# Altium PCB UP.PcbDoc
Units mil, origin at the board's own origin, x right, y up, seen from the top; angles counter-clockwise.
Board outline 7645 x 3630 mil, 2 copper layers (Top Layer, Bottom Layer); 31 components, 40 nets, 121 pads, 7 vias.
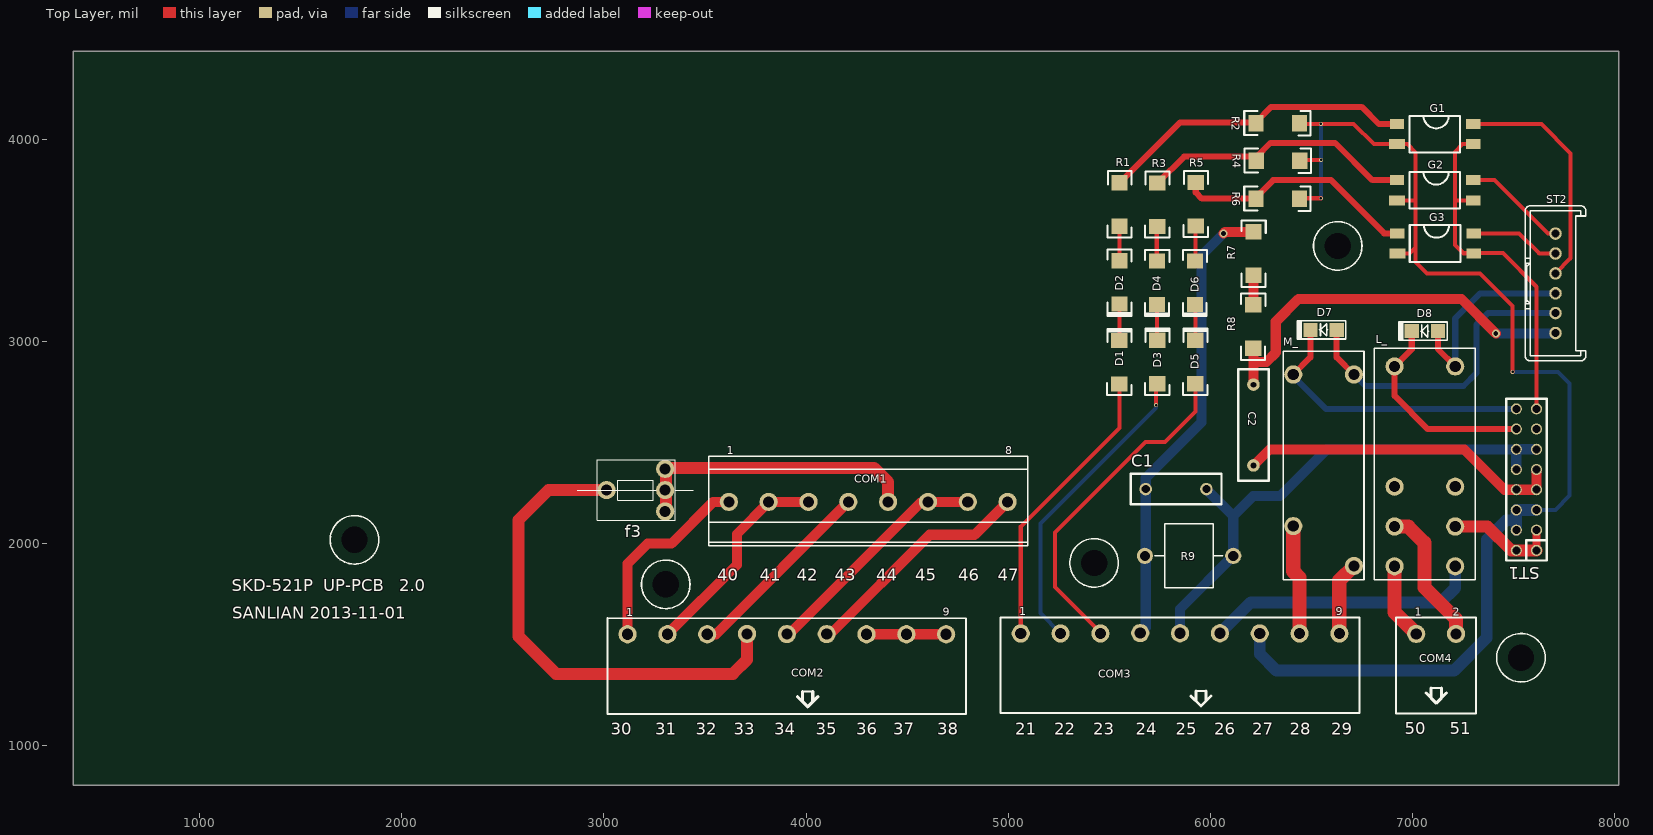
[diagram p0: Top Layer view]
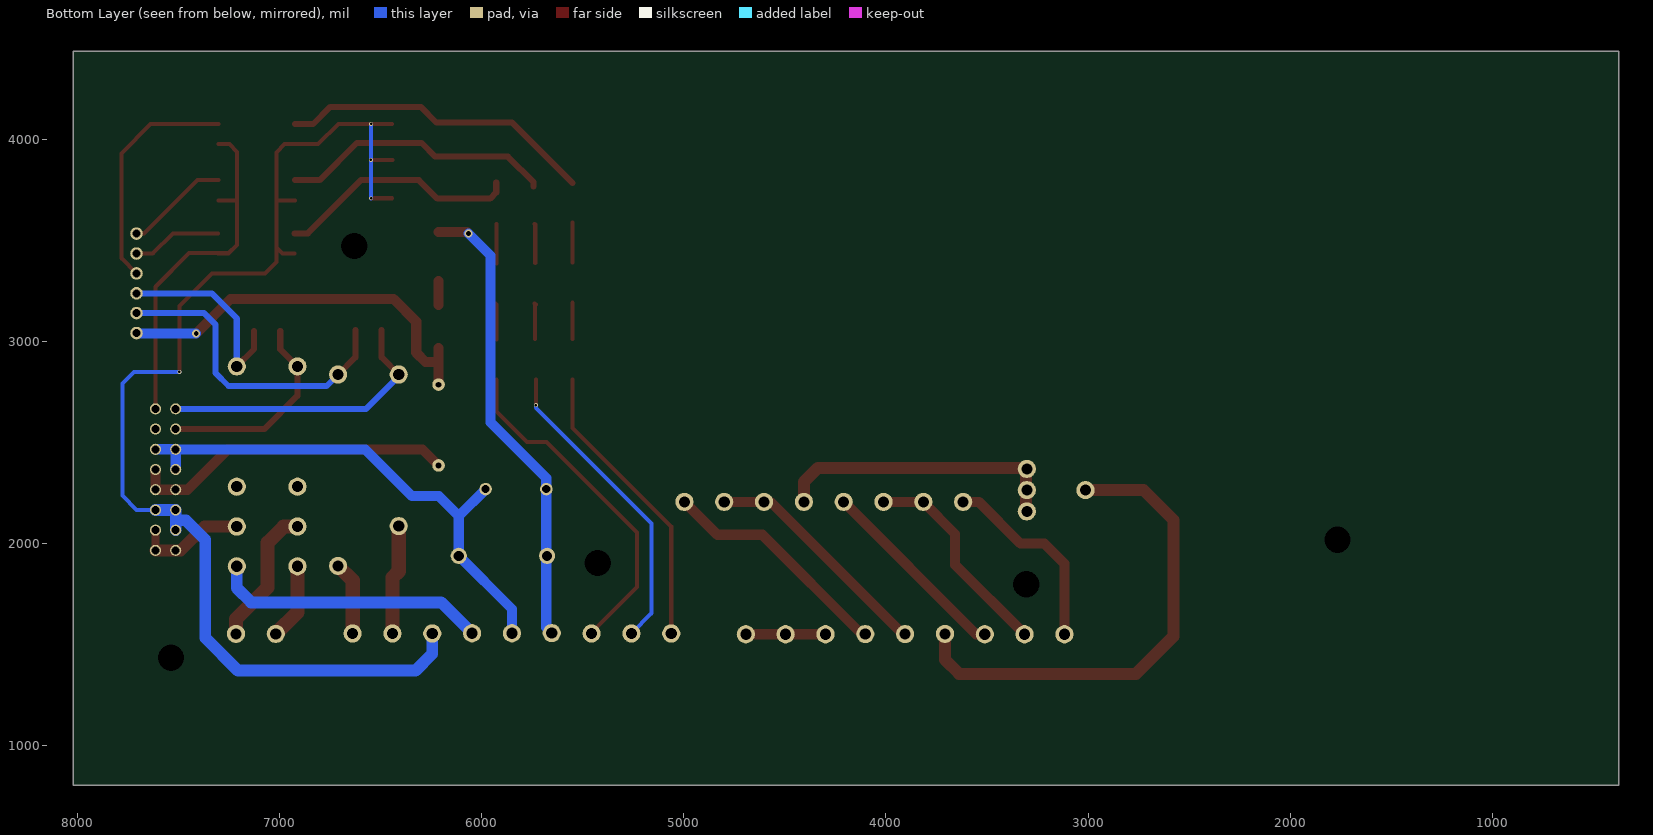
[diagram p1: Bottom Layer view, seen from below]

## Layer stack, top to bottom
Top Layer: signal copper 1.4
Dielectric: dielectric 12.6, FR-4, Dk 4.8
Bottom Layer: signal copper 1.4

## Board outline
8020,4435 8020,805 480,805 375,805 375,4435 8020,4435

## Design rules (kind name [scope] priority, off if disabled: settings)
Clearance [All] p1: gap=10
ComponentClearance [All] p1: gap=10 collisioncheckmode=3 verticalgap=10
PolygonConnect [All] p1: connectstyle=Relief reliefconductorwidth=10 reliefentries=4 polygonreliefangle="90 Angle"
RoutingVias [All] p1: holewidth=28 width=50 viastyle="Through Hole" minholewidth=28 minwidth=50 maxholewidth=28 maxwidth=50
SolderMaskExpansion [All] p1: expansion=4
TestPointUsage [All] p1: valid=0 allowmultiple=FALSE
Testpoint [All] p1: side=15 testpointundercomponent=TRUE minsize=40 maxsize=100 preferedsize=60 minholesize=0 maxholesize=40 preferedholesize=32 testpointgrid=1 style=1023 order=0-112345678
Width [All] p1: maxlimit=300 minlimit=10 preferedwidth=10
18 further rules are at their usual default settings.

## Components (designator, comment, footprint, x,y, rotation, side; value= is the part's Value field where it differs from the comment)
C1 "0.47nF/440V" RAD0.3 5680,2269 r0 top
C2 "33nF/400V" RAD0.4 6213,2786 r270 top
COM1 "CON8" "MKDS 3/8" 3618,2206 r0 top
COM2 "MSTB 2.5/9-G" "MSTB 2.5/9-G" 3117,1551 r0 top
COM3 "MSTB 2.5/9-G" "MSTB 2.5/9-G" 5062,1555 r0 top
COM4 "MSTB 2.5/2-G" "MSTB 2.5/2-G" 7018,1553 r0 top
D1 "GP10Y" ttd 5550,2907 r90 top
D2 "BZY97C100GP" ttd 5550,3281 r270 top
D3 "GP10Y" ttd 5738,2908 r90 top
D4 "BZY97C100GP" ttd 5736,3280 r270 top
D5 "GP10Y" ttd 5926,2908 r90 top
D6 "BZY97C100GP" ttd 5923,3280 r270 top
D7 "1N4148" 4148 6559,3059 r180 top
D8 "1N4148" 4148 7060,3053 r180 top
f3 "Component_1" f3 3168,2264 r0 top
G1 "SFH615A-3" gg 7117,4026 r270 top
G2 "SFH615A-3" gg 7117,3748 r270 top
G3 "SFH615A-3" gg 7119,3485 r270 top
L_ "RT424012" RT424012 6911,2876 r270 top
M_ "V23061-A1005-A302" V23061-A1005-A302 6410,2836 r270 top
R1 "33K/0.5W" TTR 5551,3677 r90 top
R2 "1K" TTR 6332,4079 r180 top
R3 "33K/0.5W" TTR 5738,3676 r90 top
R4 "1K" TTR 6334,3894 r180 top
R5 "33K/0.5W" TTR 5928,3678 r90 top
R6 "1K" TTR 6332,3706 r180 top
R7 "470K" TTR 6213.21,3433.81 r270 top
R8 "470K" TTR 6211,3073 r270 top
R9 "EF2500X" EF2500X 5676,1939 r0 top
ST1 "CON16" IDC16-A 7613,1966 r90 top
ST2 "CON6" STOCKO6V 7707,3041 r90 top

## Footprints (in the part's own frame and the unit in brackets; to place one, negate y for a bottom-side part, rotate by r counter-clockwise, add the part's x,y. Pads: shape width x height; smd on the part's side, far side on the other; paste and mask are expansions set on the pad)
4148 [mil]
  rect 70x70 smd: 1(-65.81,2.26) 2(64.19,2.26)
  silkscreen extent -111,-43 129,47
EF2500X [mil]
  round 80 hole 50: 1(0,0) 2(437,0)
  silkscreen extent 50,-158 386,158
f3 [mil]
  round 90 hole 55: 1(-155,0) 2(135,-105) 2(135,0) 2(135,105)
  silkscreen extent -300,-150 275,150
gg [mm]
  rect 1.25x1.8 smd: 1(-1.245,-4.928) 3(1.295,4.672) 4(-1.245,4.672)
  rect 1.25x2 smd: 2(1.295,-4.928)
  silkscreen extent -2.27,-3.38 2.33,2.97
IDC16-A [mil]
  round 55 hole 39.37: 1(0,0) 2(0,100) 3(100,0) 4(100,100) 5(200,0) 6(200,100) 7(300,0) 8(300,100) 9(400,0) 10(400,100) 11(500,0) 12(500,100) 13(600,0) 14(600,100) 15(700,0) 16(700,100)
  silkscreen extent -50,-50 750,150
"MKDS 3/8" [mil]
  round 90 hole 55: 1(0,0) 2(197,0) 3(394,0) 4(591,0) 5(788,0) 6(985,0) 7(1182,0) 8(1379,0)
  silkscreen extent -100,-217 1478,225
"MSTB 2.5/2-G" [mil]
  round 90 hole 55: 1(0,0) 2(197,0)
  silkscreen extent -100,-394 296,80
"MSTB 2.5/9-G" [mil]
  round 90 hole 55: 1(0,0) 2(197,0) 3(394,0) 4(591,2) 5(788,1) 6(985,1) 7(1182,0) 8(1379,0) 9(1576,0)
  silkscreen extent -100,-394 1675,80
RAD0.3 [mil]
  round 62 hole 40: 1(0,0) 2(300,0)
  silkscreen extent -75,-75 375,75
RAD0.4 [mil]
  round 62 hole 28: 1(0,0) 2(400,0)
  silkscreen extent -75,-75 475,75
RT424012 [mil]
  round 90 hole 55: 11(791.85,0) 12(595,0) 14(988.7,0) 21(791.85,300) 22(595,300) 24(988.7,300) A1(0,0) A2(0,300)
  silkscreen extent -90,-100 1055,400
STOCKO6V [mil]
  round 62 hole 39.37: 1(0,0) 2(98.33,0) 3(196.67,0) 4(295,0) 5(393.33,0) 6(491.67,0)
  silkscreen extent -138,-150 629,150
ttd [mil]
  rect 75x80 smd: 1(-117.93,0.6) 2(97.07,0.6)
  silkscreen extent -173,-59 155,61
TTR [mil]
  rect 75x80 smd: 1(-107.93,0.6) 2(107.07,0.6)
  silkscreen extent -163,-59 165,61
V23061-A1005-A302 [mil]
  round 90 hole 55: 11(750,0) 14(946.85,300) A1(0,0) A2(0,300)
  silkscreen extent -115,-50 1015,350

## Part data
C1: library part CAP, "Capacitor"
D1 D3 D5 D7 D8: library part DIODE, "Diode"
D2 D4 D6: library part ZENER3, "Zener Diode"
R1 R2 R3 R4 R5 R6 R7 R8: library part RES2

## Free pads (board coordinates)
  round 90.55 hole 129.92: ""(1766,2018) ""(3306,1798) ""(5425,1904) ""(6630,3472) ""(7536,1435)

## Via types
v1: diameter 19.68, hole 11.81, Top Layer to Bottom Layer, 5 vias
v2: diameter 39.37, hole 23.62, Top Layer to Bottom Layer, 2 vias

## Nets (pads, with @x,y where several pads share a name; then routed paths per layer and width w, separated by ;. In a path a pad name is that pad's centre, name@x,y a point inside that pad or via, vN(x,y) a via of type N, cw(c..) or ccw(c..) an arc to the next point about the centre after c; other vN are vias at no path point)
12V: D7.2 M_.A1 ST1.16 | length 1434.6
  Top Layer w30: M_.A1 6494.81,2920.81 D7.2
  Bottom Layer w30: M_.A1 6410,2827 6571,2666 ST1.16
AC220_L: L_.21 ST1.1 ST1.2 ST1.3 | length 550.9
  Top Layer w39.37: ST1.1 ST1.3
  Top Layer w59.06: L_.21 7369.85,2084.15 7488,1966 ST1.1
AC220_N: COM3.7 G1.2 G2.2 G3.2 R2.1 R4.1 R6.1 ST1.4 ST1.5 ST1.6 | length 6092.6
  Top Layer w20: R4.1@6441.81,3897.79 v1(6547.79,3897.79) ; R6.1@6443.81,3707.79 v1(6546.79,3707.79) ; R2.1@6443.81,4075.79 6708.21,4075.79 6809,3975 6975,3975 7015,3935 7015,3393 7072,3336 7334,3336 7495,3175 v1(7495,2849) ; G2.2 7012,3697 7014,3695 ; G3.2 6985,3434 7015,3464
  Bottom Layer w20: v1(6546.79,3707.79) v1(6546.79,4075.79) ; v1(7495,2849) 7719,2849 7777,2791 7777,2237 7706,2166 ST1.5
  Bottom Layer w59.06: COM3.7 6244,1454 6327,1371 7205,1371 7367,1533 7367,2019 7463,2115 7506,2115 7513,2122 ; ST1.4 ST1.6 ST1.5
AC230V_L: C2.2 ST1.7 ST1.8 ST1.9 | length 1615.2
  Top Layer w50: C2.2 6292,2465 7256,2465 7455,2266 ST1.7 ST1.9
AC230V_N: C1.2 COM3.5 R9.2 ST1.10 ST1.11 ST1.12 | length 2621.3
  Bottom Layer w50: COM3.5 5850,1676 R9.2@6118.5,1944.5 ; C1.2 6113,2136 ; R9.2 6113,2136 ; ST1.10 7513,2465 6575,2465 6344,2234 6211,2234 6113,2136 ; ST1.12@7513,2463 7516,2466 ST1.11
COM-21#: COM3.1 D1.1 | length 1459.4
  Top Layer w20: COM3.1 5062,2083 5550.4,2571.4 D1.1@5550.4,2812.07
COM-22#: COM3.2 D3.1 | length 1534.6
  Top Layer w20: v1(5731.4,2684.4) D3.1@5731.4,2811.07
  Bottom Layer w20: COM3.2 5159,1655 5159,2099 5731.4,2671.4 v1(5731.4,2684.4)
COM-23#: COM3.3 D5.1 | length 1691.1
  Top Layer w20: COM3.3 5456,1560 5232,1784 5232,2054 5680,2502 5775,2502 5926.4,2653.4 D5.1@5926.4,2810.07
COM-24#: C1.1 COM3.4 R7.1 R9.1 | length 2299.7
  Top Layer w50: v2(6064.79,3533.79) 6072.75,3541.75 R7.1
  Bottom Layer w50: COM3.4 5680,1584 5680,2324 5956,2600 5956,3425 v2(6064.79,3533.79)
COM-26#: COM3.6 L_.24 | length 1364.1
  Bottom Layer w59.06: COM3.6 6200,1709 7140,1709 7211,1780 L_.24
COM-28#: COM3.8 M_.11 | length 543.8
  Top Layer w70.87: M_.11 6410,1863 6441,1832 COM3.8
COM-29#: COM3.9 M_.14 | length 364
  Top Layer w70.87: COM3.9 6638,1817.15 M_.14
COM-50#: COM4.1 L_.14 | length 378.6
  Top Layer w70.87: L_.14 6911,1660 COM4.1
COM-51#: COM4.2 L_.11 | length 696.2
  Top Layer w70.87: L_.11 6977.85,2084.15 7059,2003 7059,1782 7215,1626 COM4.2
FUS1: COM1.5 f3.2 | length 1445.4
  Top Layer w59.06: f3.2@3303,2361 3316,2374 4336,2374 4406,2304 COM1.5 ; f3.2@3307,2156 f3.2@3307,2366
FUS2: COM2.4 f3.1 | length 2436.5
  Top Layer w59.06: f3.1 2725,2264 2578,2117 2578,1540 2763,1355 3638,1355 3708,1425 COM2.4
J1-13#: D8.2 L_.A1 ST1.14 | length 1025.8
  Top Layer w30: D8.2 6995.81,2960.81 L_.A1 6911,2730 7075,2566 ST1.14
J1-14#: G1.3 G2.3 G3.3 ST1.15 | length 1859.7
  Top Layer w20: 7210,3476 7252,3434 G3.3 ; 7211,3697 G2.3 ; G1.3 7248,3975 7210,3937 7210,3477 7251,3436 7447,3436 7613,3270 ST1.15
J2-1#: G2.4 ST2.6 | length 515.5
  Top Layer w20: G2.4 7406,3797 7670.33,3532.67 ST2.6
J2-2#: G3.4 ST2.5 | length 445.3
  Top Layer w20: G3.4 7527,3534 7626.67,3434.33 ST2.5
J2-3#: G1.4 ST2.4 | length 1166.2
  Top Layer w20: G1.4 7637,4075 7782,3930 7782,3411 ST2.4
J2-4#: D8.1 L_.A2 ST2.3 | length 995.3
  Top Layer w30: D8.1 7125.81,2961.19 L_.A2
  Bottom Layer w30: L_.A2 7211,3114 7334.67,3237.67 ST2.3
J2-5#: D7.1 M_.A2 ST2.2 | length 1566.5
  Top Layer w30: D7.1 6624.81,2921.19 M_.A2
  Bottom Layer w30: M_.A2 6767,2779 7252,2779 7316,2843 7316,3083 7372.33,3139.33 ST2.2
J2-6#: C2.1 R8.2 ST2.1 | length 1963.6
  Top Layer w50: C2.1 R8.2@6213,2965.93 ; 6213,2898 6277,2898 6323,2944 6323,3097 6435,3209 7242,3209 v2(7412,3039)
  Bottom Layer w50: v2(7412,3039) 7705,3039 ST2.1
NetCOM1_1: COM1.1 COM2.1 | length 976.7
  Top Layer w50: COM2.1 3117,1900 3217,2000 3335,2000 3541,2206 COM1.1
NetCOM1_2: COM1.2 COM1.3 COM2.2 | length 1058.3
  Top Layer w50: COM2.2 3658,1895 3658,2047 3817,2206 COM1.3
NetCOM1_4: COM1.4 COM2.3 | length 969.3
  Top Layer w50: COM2.3 3554,1551 COM1.4
NetCOM1_6: COM1.6 COM1.7 COM2.5 | length 1165.9
  Top Layer w50: COM2.5 3917,1552 4571,2206 COM1.6 COM1.7
NetCOM1_8: COM1.8 COM2.6 | length 1165.9
  Top Layer w50: COM2.6 4121,1552 4612,2043 4834,2043 COM1.8
NetCOM2_7: COM2.7 COM2.8 COM2.9 | length 394
  Top Layer w50: COM2.7 COM2.8 COM2.9
NetD1_2: D1.2 D2.2 | length 179
  Top Layer w20: D1.2@5550.4,3012.07 5550.4,3190.74 D2.2@5550.6,3190.93
NetD2_1: D2.1 R1.1 | length 196.1
  Top Layer w20: D2.1@5550.6,3390.93 R1.1@5550.6,3587
NetD3_2: D3.2 D4.2 | length 179.4
  Top Layer w20: D4.2@5731.4,3181.74 D4.2@5737.6,3187.93 ; D3.2@5735.4,3011.07 D4.2@5735.4,3181.74
NetD4_1: D4.1 R3.1 | length 194.8
  Top Layer w20: R3.1@5733.6,3576.81 R3.1@5737.79,3581 ; D4.1@5734.6,3387.93 R3.1@5734.6,3576.81
NetD5_2: D5.2 D6.2 | length 177.6
  Top Layer w20: D5.2@5926.4,3010.07 5926.4,3181.74 D6.2@5930.6,3185.93
NetD6_1: D6.1 R5.1 | length 195.1
  Top Layer w20: D6.1@5925.6,3385.93 R5.1@5925.6,3581
NetG1_1: G1.1 R1.2 R2.2 | length 1564.7
  Top Layer w30: R1.2@5549.79,3782.79 5849,4082 6223,4082 6301,4160 6748,4160 6833,4075 G1.1
NetG2_1: G2.1 R3.2 R4.2 | length 1357.6
  Top Layer w30: R3.2@5743,3766 5743,3787 5870,3914 6230,3914 6297,3981 6617,3981 6801,3797 G2.1
NetG3_1: G3.1 R5.2 R6.2 | length 1205.4
  Top Layer w30: R5.2 5927.4,3736.58 5957.98,3706 6219,3706 6310,3797 6597,3797 6860,3534 G3.1
NetR7_2: R7.2 R8.1 | length 117.9
  Top Layer w50: R8.1@6213.21,3180.93 R7.2@6213.21,3298.81
pads on no net: L_.12 L_.22 ST1.13

## Silkscreen, mask and mechanical layers (free items; w line width, h text height)
Top Overlay:
  circle w8: c7536,1435 r120
  circle w8: c5425,1904 r120
  circle w8: c1766,2018 r120
  circle w8: c3306,1798 r120
  circle w8: c6630,3472 r120
  text "40" at 3561,1816 h60
  text "41" at 3772,1816 h60
  text "42" at 3954,1816 h60
  text "43" at 4143,1816 h60
  text "44" at 4347,1816 h60
  text "45" at 4541,1816 h60
  text "46" at 4753,1816 h60
  text "47" at 4949,1816 h60
  text "SKD-521P  UP-PCB   2.0" at 1159,1764 h60
  text "SANLIAN 2013-11-01" at 1162,1627 h60
  text "50" at 6962,1056 h60
  text "51" at 7185,1056 h60
  text "30" at 3033,1055 h60
  text "31" at 3255,1055 h60
  text "32" at 3454,1055 h60
  text "33" at 3642,1055 h60
  text "34" at 3842,1055 h60
  text "35" at 4049,1055 h60
  text "36" at 4247,1055 h60
  text "37" at 4432,1055 h60
  text "38" at 4648,1055 h60
  text "21" at 5034,1055 h60
  text "22" at 5228,1055 h60
  text "23" at 5421,1055 h60
  text "24" at 5630,1055 h60
  text "25" at 5828,1055 h60
  text "26" at 6020,1055 h60
  text "27" at 6208,1055 h60
  text "28" at 6393,1055 h60
  text "29" at 6597,1055 h60
Mechanical 1:
  lines w8: 1010,1484 1010,2269 1250,2269 1250,2509 5388,2509 5388,4009 5540,4009 5540,4239 7865,4239 7865,3414 7865,1009 2825,1009 2825,1169 2195,1169 2195,1484 1010,1484

## Text inside footprints (layer, text, board x,y; h text height)
COM1: Top Overlay "1" at 3608,2441 h40; Top Overlay "8" at 4984,2442 h40
COM2: Top Overlay "9" at 4676,1642 h40; Top Overlay "1" at 3110,1641 h40
COM3: Top Overlay "9" at 6621,1646 h40; Top Overlay "1" at 5055,1645 h40
COM4: Top Overlay "1" at 7011,1643 h40; Top Overlay "2" at 7200,1643 h40